# EAGLE board lineterm (EAGLE 6.2)
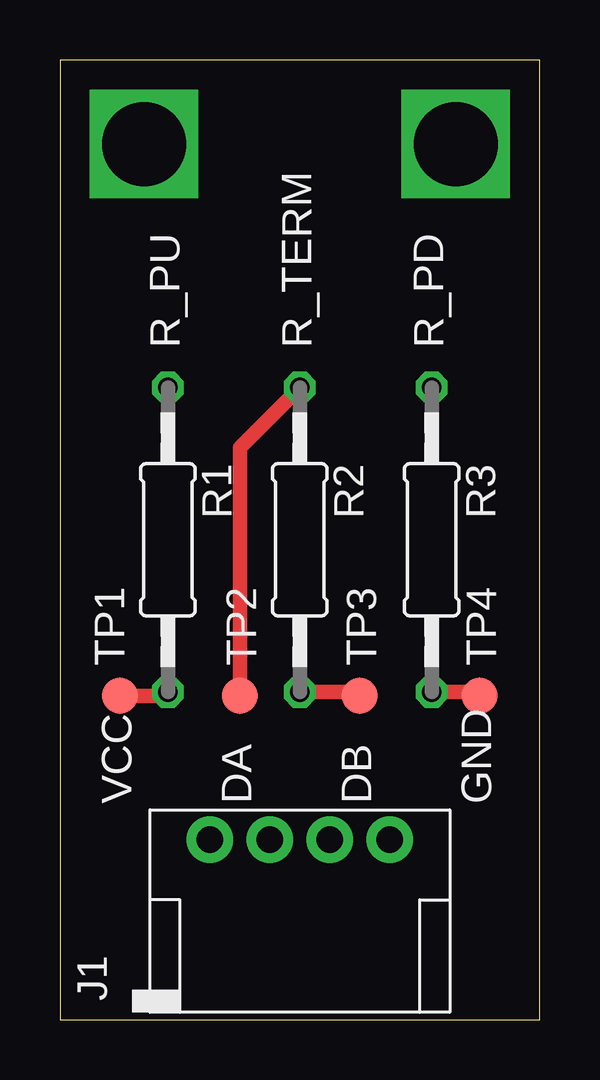
[diagram p0: board, top side]
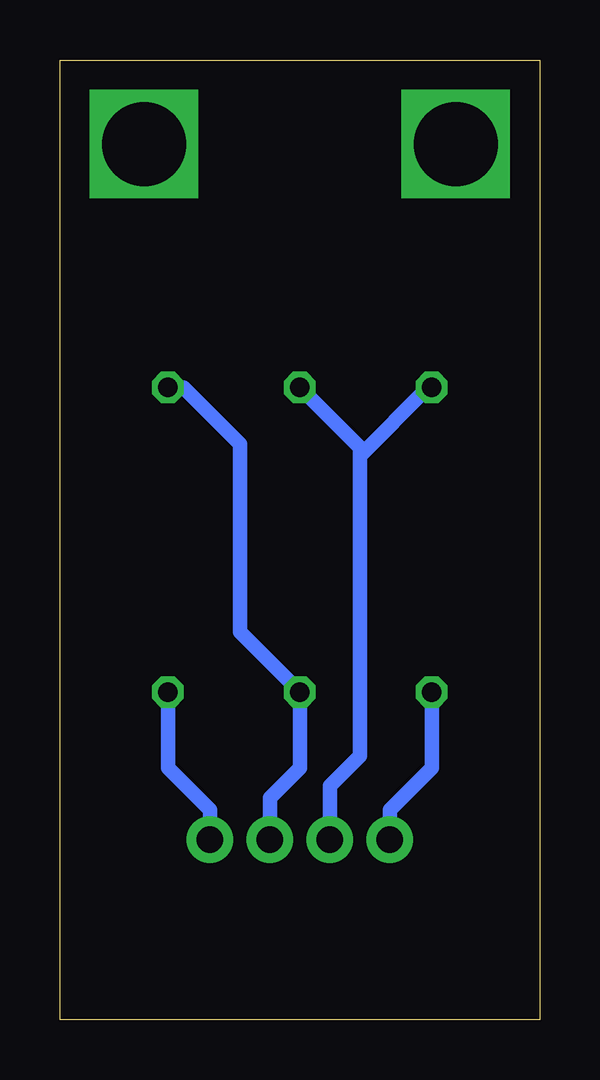
[diagram p1: board, bottom side, seen from below]

Size 20 x 40 mm. Coordinates in mm from the lower left corner, seen from the top.
Outline: 0,0 20,0 20,40 0,40 0,0
Copper layers (1*16): Top 0.035mm / dielectric 1.5mm / Bottom 0.035mm
Design rules: minimum track width 6mil, minimum drill 12mil, track to track 6mil, track to pad 6mil, pad to pad 6mil, via to via 6mil, smd to smd 0mil, copper to edge 10mil, drill to drill 10mil, minimum pad ring 10mil, minimum via ring 6mil, stop-mask expansion 2mil, vias tented up to drill 100mil, thermal gap 10mil

## Footprints (pad centres in the part's own frame; a part is rotated, then mirrored left to right if it is on the bottom)
PTSM0,5/4-HH-2,5-THR = drill 1.1 pad 1.93: 1 -3.75,0; 2 -1.25,0; 3 1.25,0; 4 3.75,0
0207/12 = drill 0.813 octagon: 1 -6.35,0; 2 6.35,0
TP15R = smd 1.5 x 1.5: TP 0,0

## Placement (x,y rotation side)
J1  MB_CONN  [PTSM0,5/4-HH-2,5-THR]  10,7.5 0 top
R1  R_PU  [0207/12]  4.5,20 270 top
R2  R_TERM  [0207/12]  10,20 90 top
R3  R_PD  [0207/12]  15.5,20 90 top
TP1  PTR1TP15R  [TP15R]  2.5,13.5 0 top
TP2  PTR1TP15R  [TP15R]  7.5,13.5 0 top
TP3  PTR1TP15R  [TP15R]  12.5,13.5 0 top
TP4  PTR1TP15R  [TP15R]  17.5,13.5 0 top

## Library data of the parts
J1 = connectors-pheonix
R1-R3 = resistor
TP1-TP4 = testpad

## Nets
GND: J1.4 R3.1 TP4.TP
N$2: J1.3 R2.1 R3.2 TP3.TP
N$3: J1.2 R1.1 R2.2 TP2.TP
VCC: J1.1 R1.2 TP1.TP

## Tracks (layer width: path | path; a pad name or v marks a point on that pad's centre or on a via)
GND
  Top 0.61: R3.1 17.35,13.65 TP4.TP
  Bottom 0.61: J1.4 13.75,8.75 15.5,10.5 R3.1
N$1  (via drill 3.5 pad 3.81)
  other vias: 3.5,36.5
N$2
  Top 0.61: R2.1 12.35,13.65 TP3.TP
  Bottom 0.61: J1.3 11.25,9.25 10,10.5 R2.1 12.5,16.15 12.5,24 14.85,26.35 R3.2
N$3
  Top 0.61: TP2.TP 7.5,23.85 R2.2
  Bottom 0.61: J1.2 8.75,9.75 7.5,11 7.5,23.5 | 7.5,23.5 7.5,23.85 R2.2 | R1.1 4.65,26.35 7.5,23.5
N$4  (via drill 3.5 pad 3.81)
  other vias: 16.5,36.5
VCC
  Top 0.61: TP1.TP 4.35,13.5 R1.2
  Bottom 0.61: J1.1 6.25,8.75 4.5,10.5 R1.2

## Text on the board
tNames: R_PU | R_TERM | R_PD | VCC | DA | DB | GND